# Altium PCB Power_Regulators.PcbDoc
Units mm, origin at the board's own origin, x right, y up, seen from the top; angles counter-clockwise.
Board outline 97 x 70 mm, 2 copper layers (Top Layer, Bottom Layer), stack 1.1 mm thick; 15 components, 8 nets, 46 pads, 4 vias.
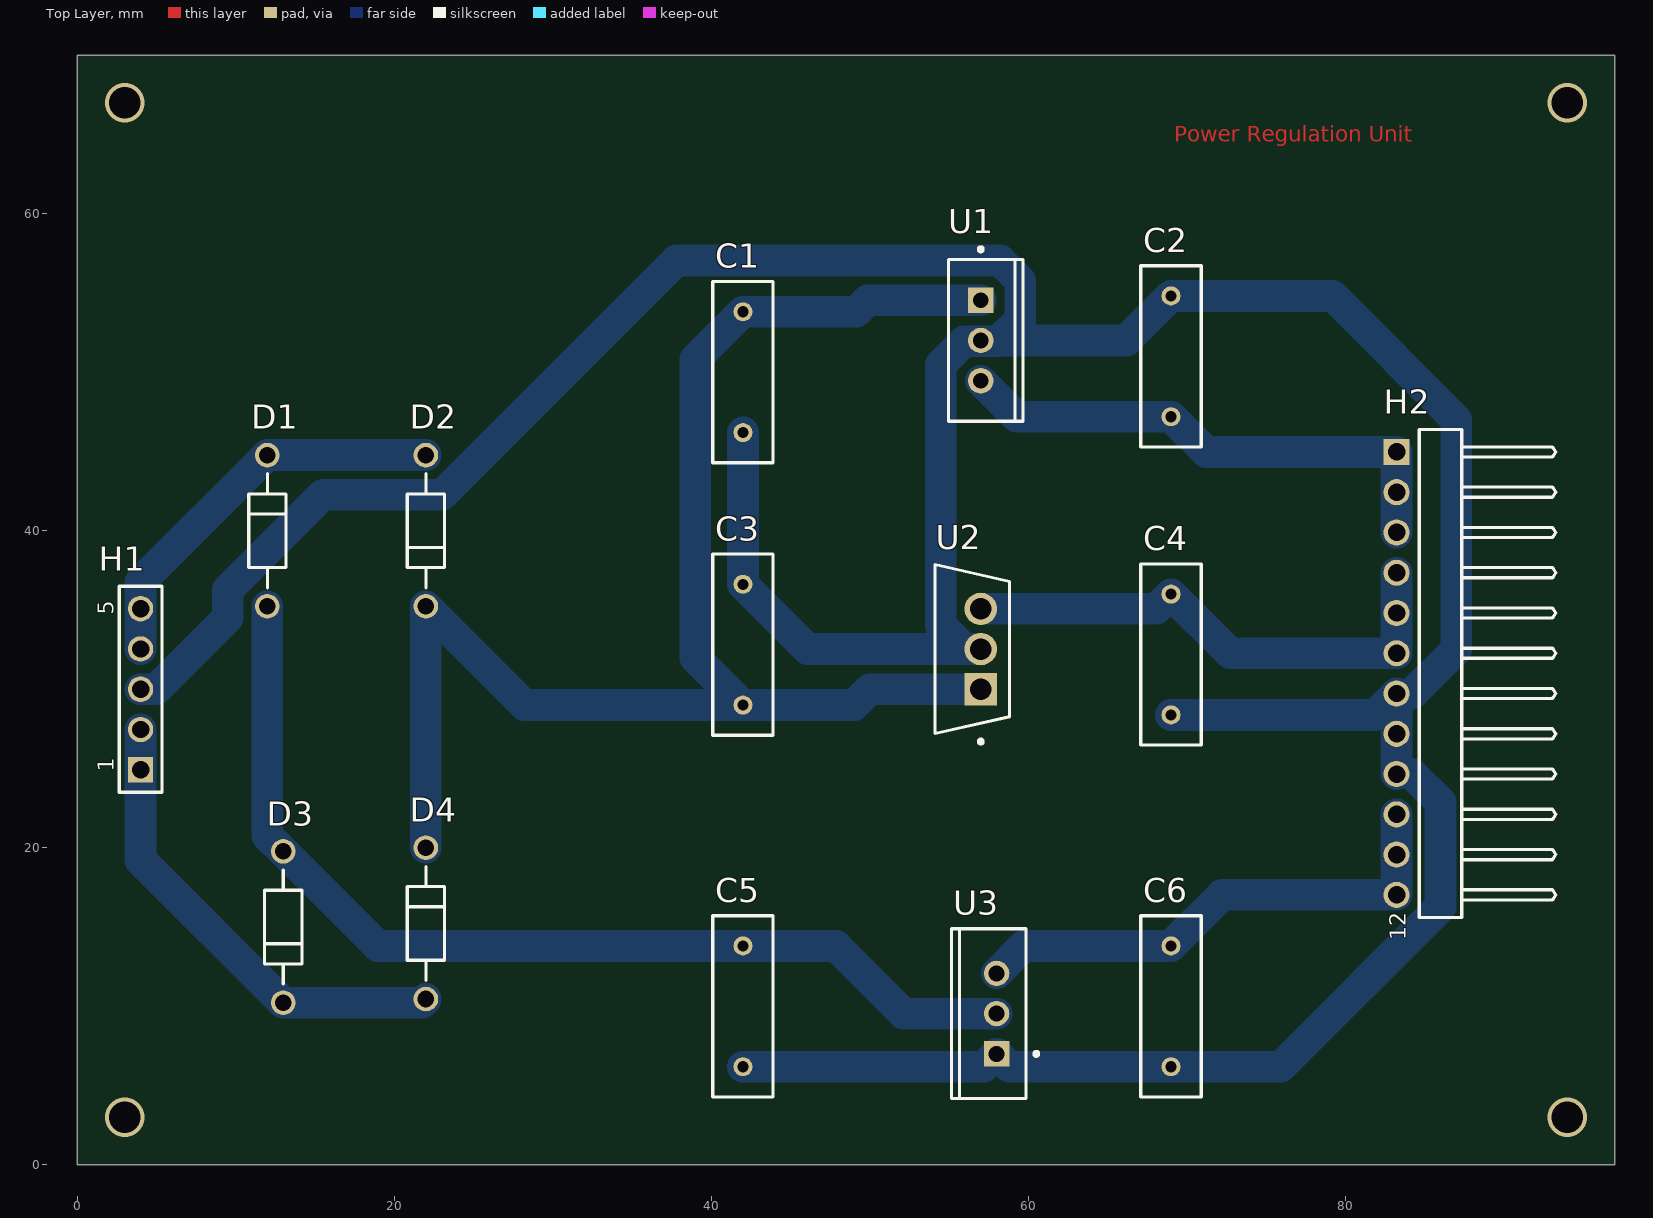
[diagram p0: Top Layer view]
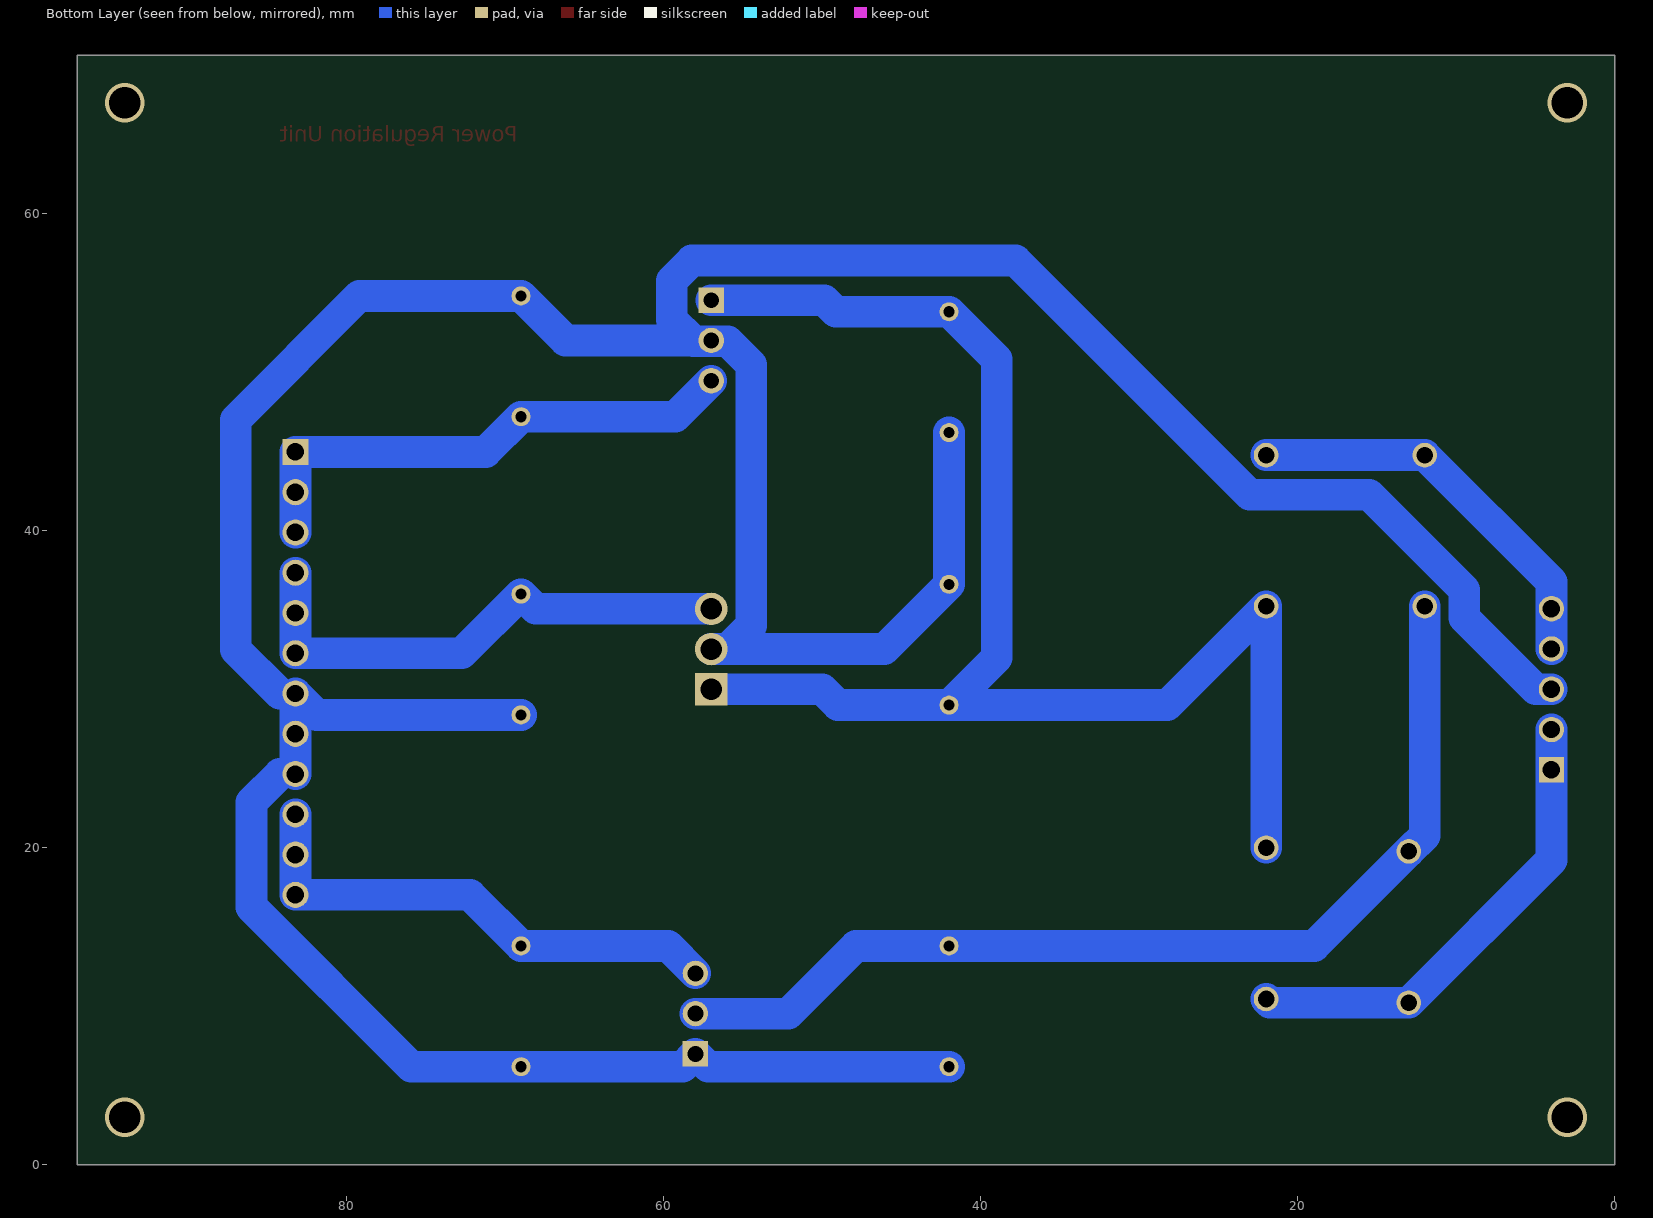
[diagram p1: Bottom Layer view, seen from below]

## Layer stack, top to bottom
Top Solder: solder mask 0.05, SM-001, Dk 4
Top Layer: signal copper 0.1
Dielectric 1: dielectric 0.9, FR-4, Dk 4.8
Bottom Layer: signal copper 0.1
Bottom Solder: solder mask 0.05, SM-001, Dk 4

## Board outline
0,0 97,0 97,70 0,70

## Design rules (kind name [scope] priority, off if disabled: settings)
Clearance [All] p1: gap=0 ignorepadtopadclearanceinfootprint=FALSE
PolygonConnect [All] p1: connectstyle=Relief reliefconductorwidth=0.254 reliefentries=4 polygonreliefangle="90 Angle" airgapwidth=0.254
RoutingVias [All] p1: holewidth=2 width=3 viastyle="Through Hole" minholewidth=0.711 minwidth=1.27 maxholewidth=0.711 maxwidth=1.27
SilkToSilkClearance [All] p1: silktosilkclearance=0
SolderMaskExpansion [All] p1: expansion=0.102 istentingtop=FALSE
Width [All] p1: maxlimit=2 minlimit=0.254 preferedwidth=2
29 further rules are at their usual default settings.

## Components (designator, comment, footprint, x,y, rotation, side; value= is the part's Value field where it differs from the comment)
C1 "Cap" RAD-0.3 42,50 r90 top value=470uF
C2 "Cap" RAD-0.3 69,51 r270 top value=0.01uF
C3 "Cap" RAD-0.3 42,32.81 r270 top value=470uF
C4 "Cap" RAD-0.3 69,32.19 r90 top value=0.01uF
C5 "Cap" RAD-0.3 42,10 r90 top value=470uF
C6 "Cap" RAD-0.3 69,10 r90 top value=0.01upF
D1 "1N4007G" ONSC-AXIAL_LEAD-2-59-10_P 12,40 r270 top
D2 "1N4007G" ONSC-AXIAL_LEAD-2-59-10_P 22,40 r90 top
D3 "1N4007G" ONSC-AXIAL_LEAD-2-59-10_P 13,15 r90 top
D4 "1N4007G" ONSC-AXIAL_LEAD-2-59-10_P 22,15.23 r270 top
H1 "61300511121" 61300511121 4,30 r90 top
H2 "61301211021" 61301211021 86,31 r90 top
U1 "LM7805CT" FAIR-TO-220-3 57,52 r0 top
U2 "LM7812CT" FP-TO220B03-MFG 56.46,32.535 r180 top
U3 "LM7912CT" NDE0003A 58,9.54 r90 top

## Footprints (in the part's own frame and the unit in brackets; to place one, negate y for a bottom-side part, rotate by r counter-clockwise, add the part's x,y. Pads: shape width x height; smd on the part's side, far side on the other; paste and mask are expansions set on the pad)
61300511121 [mm] "Pin Header, pitch 2.54 mm, THT, Vertical, single row, 5p"
  rect 1.6x1.6 hole 1.1: 1(-5.08,0)
  round 1.6 hole 1.1: 2(-2.54,0) 3(0,0) 4(2.54,0) 5(5.08,0)
  silkscreen extent -6.5,-1.35 6.5,1.35, body extent -6.35,-1.27 6.35,1.27, height 8.57
61301211021 [mm] "Pin Header, pitch 2.54 mm, THT, Angled, single row, 12p"
  rect 1.65x1.65 hole 1.1: 1(13.97,2.77)
  round 1.65 hole 1.1: 2(11.43,2.77) 3(8.89,2.77) 4(6.35,2.77) 5(3.81,2.77) 6(1.27,2.77) 7(-1.27,2.77) 8(-3.81,2.77) 9(-6.35,2.77) 10(-8.89,2.77) 11(-11.43,2.77) 12(-13.97,2.77)
  silkscreen extent -15.39,-7.27 15.39,1.35, body extent -15.24,-7.27 15.24,3.09, height 2.58
FAIR-TO-220-3 [mm] "FM, 3-Leads, Body 10.2x4.7mm, Pitch 2.54mm"
  rect 1.6x1.6 hole 1: 1(0,2.54)
  round 1.6 hole 1: 2(0,0) 3(0,-2.54)
  silkscreen extent -2.04,-5.1 2.66,5.87, body extent -2.04,-5.1 2.66,5.1, height 18.95
FP-TO220B03-MFG [mm]
  rect 2.05x2.05 hole 1.35 paste-1000 mask+0: 1(-0.54,2.535)
  round 2.05 hole 1.35 paste-1000 mask+0: 2(-0.54,0) 3(-0.54,-2.535)
  silkscreen extent -2.35,-5.34 2.35,5.96, body extent -2.45,-5.44 2.45,5.44, height 0.25
NDE0003A [mm] "FM, 3-Leads, Body 10.7x4.7mm, Pitch 2.54mm"
  rect 1.6x1.6 hole 1: 1(-2.54,0)
  round 1.6 hole 1: 2(0,0) 3(2.54,0)
  silkscreen extent -5.35,-2.63 5.35,2.85, body extent -5.4,-1.9 5.4,2.9, height 19.4
ONSC-AXIAL_LEAD-2-59-10_P [mm] "AXIAL, 2-Leads, Diameter 2.35mm"
  round 1.55 hole 1.05: 1(-4.77,0) 2(4.77,0)
  silkscreen extent -3.59,-1.17 3.59,1.17
RAD-0.3 [mm] "Radial Cap, Thru-Hole; 2 Leads; 0.3 in Pin Spacing"
  round 1.2 hole 0.7: 1(-3.81,0) 2(3.81,0)
  silkscreen extent -5.71,-1.91 5.71,1.91

## Part data
C1 C2 C3 C4 C5 C6: "Capacitor", LatestRevisionDate=17-Jul-2002, LatestRevisionNote="Re-released for DXP Platform.", PackageDescription="Radial Cap, Thru-Hole; 2 Leads; 0.3 in Pin Spacing", PackageReference=RAD-0.3, Published=8-Jun-2000, Publisher="Altium Limited"
D1 D2 D3 D4: library part CMP-0902-00143-1, "Standard Recovery Rectifier, 2-Pin Axial_Lead, Pb-Free, Bulk Bag", Manufacturer="On Semiconductor", ComponentLink1Description="Manufacturer URL", ComponentLink1URL=http://www.onsemi.com/, ComponentLink2Description=Datasheet, ComponentLink2URL=http://www.onsemi.com/pub_link/Collateral/1N4001-D.PDF, ComponentLink3Description="Package Specification", ComponentLink3URL=http://www.onsemi.cn/pub_link/Collateral/59-10.PDF, DatasheetVersion="Rev. 13", IFSM Max (A)=30, IO(rec) Max (A)=1, Mounting Technology="Through Hole", PackageDescription="2-Pin, Axial Lead, Diameter 2.35 mm", PackageReference=AXIAL_LEAD-2-59-10, PackageVersion="Rev. U, 02/2005", Packing="Bulk Bag", PartNumber=1N4007G, RoHS=TRUE, Type="Standard Recovery", VRRM Max (V)=1000
H1: library part CMP-1502-01068-1, "THT Vertical Pin Header WR-PHD, Pitch 2.54 mm, Single Row, 5 pins", Contact Resistance=20mOhm, Manufacturer="Wurth Elektronik", Operating Temperature=-40to105degC, Rated Current=3A, Withstanding Voltage=500VAC, Working Voltage=250VAC, Datasheet URL=https://katalog.we-online.de/em/datasheet/6130xx11121.pdf, Gender=Male, Manufacturer URL=http://www.we-online.de, Mounting Technology=THT, Orientation=Vertical, Package Reference=61300511121, Packaging=Bag, Part Number=61300511121, Pin Number=5, Pitch=2.54mm, Publisher=WurthElektronik, Row Number=Single
H2: library part CMP-1502-01085-1, "THT Angled Pin Header WR-PHD, Pitch 2.54 mm, Single Row, 12 pins", Contact Resistance=20mOhm, Manufacturer="Wurth Elektronik", Operating Temperature=-40to105degC, Rated Current=3A, Withstanding Voltage=500VAC, Working Voltage=250VAC, Datasheet URL=https://katalog.we-online.de/em/datasheet/6130xx11021.pdf, Gender=Male, Manufacturer URL=http://www.we-online.de, Mounting Technology=THT, Orientation=Angled, Package Reference=61301211021, Packaging=Bag, Part Number=61301211021, Pin Number=12, Pitch=2.54mm, Publisher=WurthElektronik, Row Number=Single
U1: library part CMP-2000-04938-1, "Positive Voltage Regulator, 5 V, 1 A, -40 to 125 degC, 3-Pin TO-220, RoHS, Tube", Manufacturer=FairchildSemiconductor, Maximum Input Voltage=35V, Maximum Output Current=2.2(Typ)A, Maximum Quiescent Current=8mA, Operating Temperature=-40to125degC, Output Voltage=5V, Package=3TO-220AB, Package Description="3-Pin Through Hole Device, Body 10 x 4.5 mm, Pitch 2.54 mm", Package Reference=TO-220, Typical Dropout Voltage @ Current=2@1AV, Accuracy=±4%, Category=LinearRegulator, Datasheet URL=https://datasheet.ciiva.com/26904/lm7805ct-26904988.pdf, Datasheet Version=Aug-12, Line Regulation=100mV, Load Regulation=100mV, Manufacturer URL=https://www.fairchildsemi.com/, Mounting=ThroughHole, Number of Outputs=1, Output Type=Fixed, Package URL=https://www.fairchildsemi.com/package-drawings/TO/TO220B03.pdf, Packaging=Rail/Tube, Polarity=Positive, Rad Hard=No, Type=Linear
U2: library part CMP-07128-000015-1, "IC REG LINEAR 12V 1A TO220-3", Dropout Voltage=2V, Manufacturer="ON Semiconductor", Max Supply Voltage=35V, Nominal Supply Current=5.1mA, Output Current=1A, Output Voltage=12V, Package=TO220B03, Temperature="-40°C to +125°C", Temperature Range High=+125°C, Temperature Range Low=-40°C, Accuracy Percentage=4%, Automotive=No, Category=IC, ComponentLink2Description=Datasheet, ComponentLink2URL=https://www.mouser.in/datasheet/2/308/LM7812-1125088.pdf, Device Class L1="Integrated Circuits (ICs)", Device Class L2="Power Management ICs", Device Class L3="Voltage Regulators - Linear", Digikey Description="IC REG LINEAR 12V 1A TO220-3", Height=20.4mm, Ipc Land Pattern Name=TO-220, Lead Free=Yes, Manufacturer Part Number=LM7812CT, Number of Outputs=1, Obsolete Part=true, Octopart=https://octopart.com/lm7812ct-on+semiconductor-14383031, Output Type=Fixed, RoHS=TRUE, Standoff Height=2.7mm
U3: library part CMP-0062-02472-3, "3-Terminal Negative Regulator, 3-pin TO-220", Manufacturer="Texas Instruments", PackageTopMarking=NSUZXYTTE#*LM7912CT, PowerWise=N, ComponentLink1Description="Datasheet URL", ComponentLink1URL=http://www.ti.com/general/docs/lit/getliterature.tsp?genericPartNumber=LM7912&fileType=pdf, CompType="LDO IC", PackageDescription="TO-220, Molded, 3 Lead, Straight", PackageReference=NDE0003A, PinCount=3, RoHS=N

## Via types
v1: diameter 2.5, hole 2, Top Layer to Bottom Layer, 4 vias

## Nets (pads, with @x,y where several pads share a name; then routed paths per layer and width w, separated by ;. In a path a pad name is that pad's centre, name@x,y a point inside that pad or via, vN(x,y) a via of type N, cw(c..) or ccw(c..) an arc to the next point about the centre after c; other vN are vias at no path point)
GND: C1.1 C2.1 C3.1 C4.1 C5.1 C6.1 H1.3 H2.7 H2.8 H2.9 U1.2 U2.2 U3.1 | length 252.2
  Bottom Layer w2: H1.3 4.996,30 9.5,34.504 9.5,36.266 15.504,42.27 23.036,42.27 37.806,57.04 58.221,57.04 59.5,55.761 59.5,53.319 58.181,52 ; C5.1 57.19,6.19 U3.1 58.81,6.19 C6.1 75.926,6.19 86,16.264 86,22.876 84.226,24.65 ; C1.1 C3.1 46.085,32.535 U2.2 56.99,32.545 55.955,32.545 54.475,34.024 54.475,50.471 55.964,51.96 58.141,51.96 58.181,52 ; C4.1 81.88,28.38 H2.7 H2.8 H2.9 ; 84.226,29.73 87,32.504 87,47 79.19,54.81 C2.1 66.19,52 58.181,52
NetC1_2: C1.2 C3.2 D2.1 D4.1 U1.1 U2.1 | length 95.8
  Bottom Layer w2: D4.1 D2.1 28.23,29 C3.2 ; U2.1 50,30 49,29 C3.2 ; U1.1 49.865,54.54 49.135,53.81 C1.2 39,50.81 39,32 C3.2
NetC2_2: C2.2 H2.1 H2.2 H2.3 U1.3 | length 33.2
  Bottom Layer w2: U1.3 59.27,47.19 C2.2 71.22,44.97 H2.1 H2.2 H2.3
NetC4_2: C4.2 H2.4 H2.5 H2.6 U2.3 | length 33.2
  Bottom Layer w2: U2.3 68.07,35.07 C4.2 72.73,32.27 H2.6 H2.5 H2.4
NetC5_2: C5.2 D1.2 D3.2 U3.2 | length 65.1
  Bottom Layer w2: D1.2 12,20.77 D3.2 18.96,13.81 C5.2 47.865,13.81 52.135,9.54 U3.2
NetC6_2: C6.2 H2.10 H2.11 H2.12 U3.3 | length 32.4
  Bottom Layer w2: U3.3 59.73,13.81 C6.2 72.22,17.03 H2.12 H2.11 H2.10
NetD1_1: D1.1 D2.2 H1.4 H1.5 | length 25.5
  Bottom Layer w2: H1.4 H1.5 4,36.77 D1.1 D2.2
NetD3_1: D3.1 D4.2 H1.1 H1.2 | length 30.1
  Bottom Layer w2: H1.2 H1.1 4,19.23 D3.1 21.77,10.23 D4.2
copper on no net:
  other v1: 3,3 94,3 3,67 94,67

## Other copper
Top Layer:
  text "Power Regulation Unit" at 69.2,64.533 h1

## Text inside footprints (layer, text, board x,y; h text height)
H1: Top Overlay "5" at 2.3,34.7 h1.02 r90; Top Overlay "1" at 2.3,24.8 h1.02 r90
H2: Top Overlay "12" at 83.8,14.16 h1.02 r90